# EAGLE board BPW5007-Button-LED_1.1 (EAGLE 5.06)
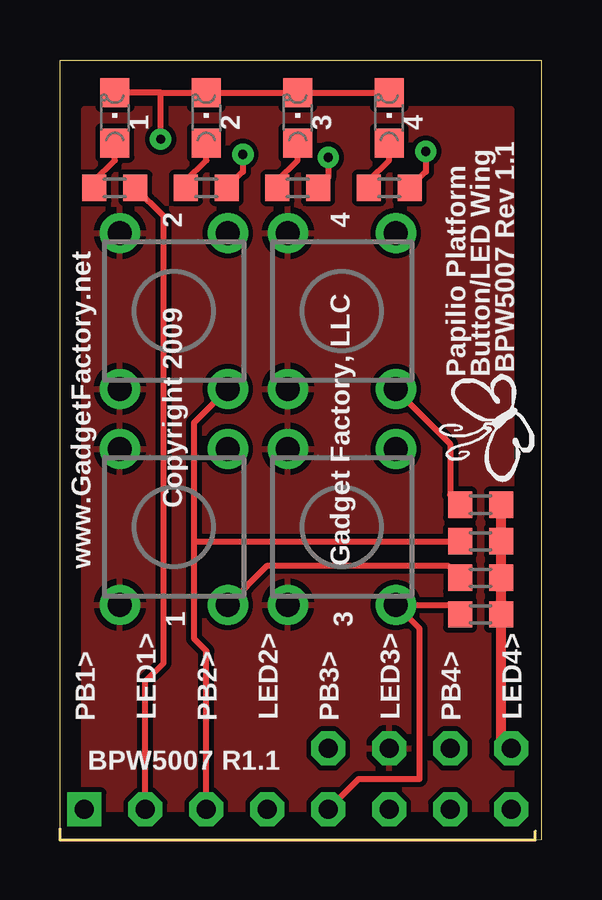
[diagram p0: board, top side]
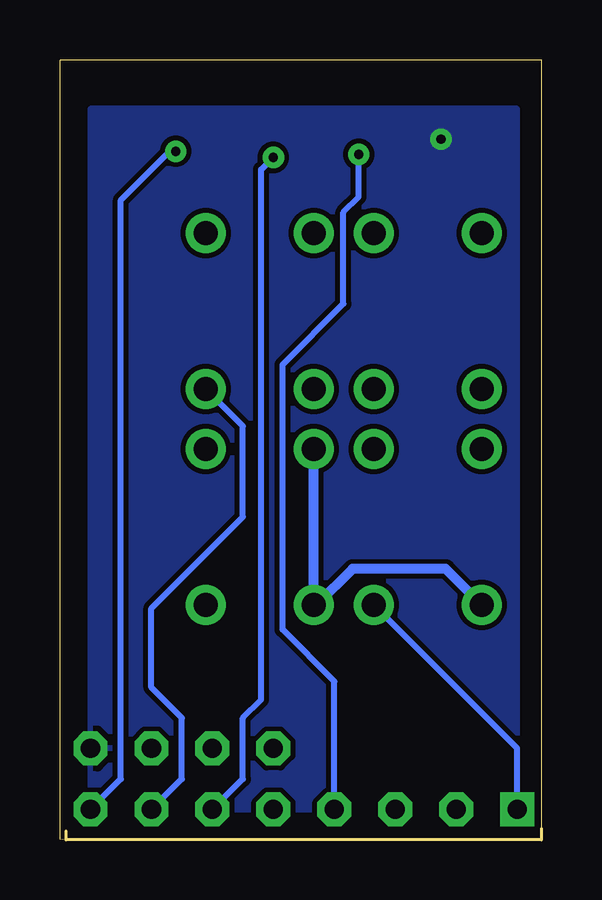
[diagram p1: board, bottom side, seen from below]

Size 20.07 x 32.51 mm. Coordinates in mm from the lower left corner, seen from the top.
Outline: 0,0 19.81,0 20.07,0.03 20.07,32.51 0,32.51 0,0
Copper layers (1*16): Top 0.035mm / dielectric 1.5mm / Bottom 0.035mm
Design rules "SparkFun_Derived_GoldePheonix_10mil *": minimum track width 10mil, minimum drill 15mil, track to track 8mil, track to pad 8mil, pad to pad 8mil, via to via 8mil, smd to smd 8mil, copper to edge 10mil, drill to drill 8mil, minimum pad ring 12mil, minimum via ring 10mil, stop-mask expansion 4mil, vias tented up to drill 18mil, thermal gap 10mil

## Footprints (pad centres in the part's own frame; a part is rotated, then mirrored left to right if it is on the bottom)
TL1105 = drill 1 pad 1.676 round: 1 -2.25,3.25; 2 2.25,3.25; 3 -2.25,-3.25; 4 2.25,-3.25
CHIPLED_0805 = smd 1.2 x 1.2: A 0,-1.05; C 0,1.05
WING_8BIT = drill 0.8 octagon: 2V5@2 16.51,3.81; 3V3@2 13.97,3.81; 5V@2 11.43,3.81; B2 3.81,1.27; B3 6.35,1.27; B4 8.89,1.27; B5 11.43,1.27; B6 13.97,1.27; B7 16.51,1.27; B8 19.05,1.27; GND@2 19.05,3.81 | drill 0.8 square: B1 1.27,1.27
R0603 = smd 1 x 1.1: 1 -0.85,0; 2 0.85,0

## Placement (x,y rotation side)
E$1  [TL1105]  4.75,13.05 0 top
E$2  [CHIPLED_0805]  2.29,30.1 0 top
E$3  [WING_8BIT]  -0.25,0 0 top
E$4  390  [R0603]  6.1,27.18 0 top
E$5  390  [R0603]  9.91,27.18 0 top
E$6  390  [R0603]  13.72,27.18 0 top
E$7  50k  [R0603]  17.53,9.4 0 top
E$8  [CHIPLED_0805]  6.1,30.1 0 top
E$9  [CHIPLED_0805]  9.91,30.1 0 top
E$10  [CHIPLED_0805]  13.72,30.1 0 top
E$11  [TL1105]  4.75,22.05 0 top
E$12  [TL1105]  11.75,22.05 0 top
E$13  [TL1105]  11.75,13.05 0 top
E$14  50k  [R0603]  17.53,10.92 0 top
E$15  50k  [R0603]  17.53,12.45 0 top
E$16  50k  [R0603]  17.53,13.97 0 top
E$17  390  [R0603]  2.29,27.18 0 top

## Library data of the parts
E$1 E$11-E$13 = GadgetFactory
E$2 E$8-E$10 = led
E$3 = GadgetFactory_Pub
E$4-E$7 E$14-E$17 = resistor

## Nets
3V3: E$1.1 E$1.3 E$3.3V3@2 E$11.1 E$11.3 E$12.1 E$12.3 E$13.1 E$13.3
GND: E$2.C E$3.GND@2 E$7.2 E$8.C E$9.C E$10.C E$14.2 E$15.2 E$16.2
S$2: E$3.B8 E$6.2
S$5: E$2.A E$17.1
S$6: E$4.1 E$8.A
S$7: E$3.B6 E$5.2
S$8: E$3.B5 E$7.1 E$13.4
S$9: E$5.1 E$9.A
S$10: E$6.1 E$10.A
S$11: E$3.B4 E$4.2
S$12: E$3.B2 E$17.2
S$13: E$3.B7 E$12.4 E$16.1
S$14: E$3.B3 E$11.4 E$15.1
S$15: E$1.4 E$3.B1 E$14.1

## Tracks (layer width: path | path; a pad name or v marks a point on that pad's centre or on a via)
3V3
  Bottom 0.406: E$13.1 E$13.3 9.38,9.8 7.87,11.3 4,11.3 E$1.3
  pour Top: 1.02,1.27 1.02,30.48 18.8,30.48 18.8,1.27
GND  (via drill 0.38)
  Top 0.254: E$10.C E$9.C E$8.C 4.19,31.15 | 4.19,31.15 E$2.C | v4.19,29.21 4.19,31.15
  Top 0.406: E$3.GND@2 18.38,3.81 E$7.2 E$14.2 E$15.2 E$16.2
  pour Bottom: 1.02,1.27 1.02,30.48 18.8,30.48 18.8,1.27
S$2  (via drill 0.38)
  Top 0.254: v15.24,28.7 15.24,27.85 E$6.2
  Bottom 0.254: v15.24,28.7 15.49,28.7 17.53,26.67 17.53,2.54 E$3.B8
S$5
  Top 0.254: E$17.1 1.44,27.47 2.29,28.32 E$2.A
S$6
  Top 0.254: E$4.1 5.25,27.47 6.1,28.32 E$8.A
S$7  (via drill 0.38)
  Top 0.254: v11.18,28.45 11.18,27.6 E$5.2
  Bottom 0.254: v11.18,28.45 11.68,27.94 11.68,5.84 12.45,5.08 12.45,2.54 E$3.B6
S$8
  Top 0.254: E$3.B5 12.45,2.54 14.99,2.54 14.99,8.81 E$13.4 16.28,9.8 E$7.1
S$9
  Top 0.254: E$5.1 9.06,27.47 9.91,28.32 E$9.A
S$10
  Top 0.254: E$6.1 12.87,27.47 13.72,28.32 E$10.A
S$11  (via drill 0.38)
  Top 0.254: v7.62,28.57 7.62,27.85 E$4.2
  Bottom 0.254: E$3.B4 8.64,6.6 10.79,8.76 10.79,19.81 8.26,22.35 8.26,26.16 7.62,26.8 v7.62,28.57
S$12
  Top 0.254: 3.56,26.76 E$17.2 4.32,26 4.32,7.37 3.56,6.6 E$3.B2
S$13
  Top 0.254: E$16.1 16.26,14.39 16.26,16.51 14,18.77 E$12.4
  Bottom 0.254: E$12.4 12.45,17.25 12.45,13.46 16.26,9.65 16.26,6.35 14.99,5.08 14.99,2.54 E$3.B7
S$14
  Top 0.254: E$11.4 5.59,17.39 5.59,12.45 | 5.59,12.45 E$15.1 | 5.59,12.45 5.59,8.38 6.1,7.87 E$3.B3
S$15
  Top 0.254: E$14.1 16.17,11.43 8.64,11.43 E$1.4
  Bottom 0.254: E$3.B1 1.02,3.82 E$1.4

## Text on the board
tPlace: 1 | 2 | 3 | 4 | 2 | 4 | Papilio Platform | Button/LED Wing | BPW5007 Rev 1.1 | Copyright 2009 | www.GadgetFactory.net | Gadget Factory, LLC | LED1> | 1 | LED2> | 3 | LED3> | LED4> | PB1> | PB2> | PB3> | PB4> | BPW5007 R1.1